# EAGLE board rgbcontroller-3 (EAGLE 8.4.1)
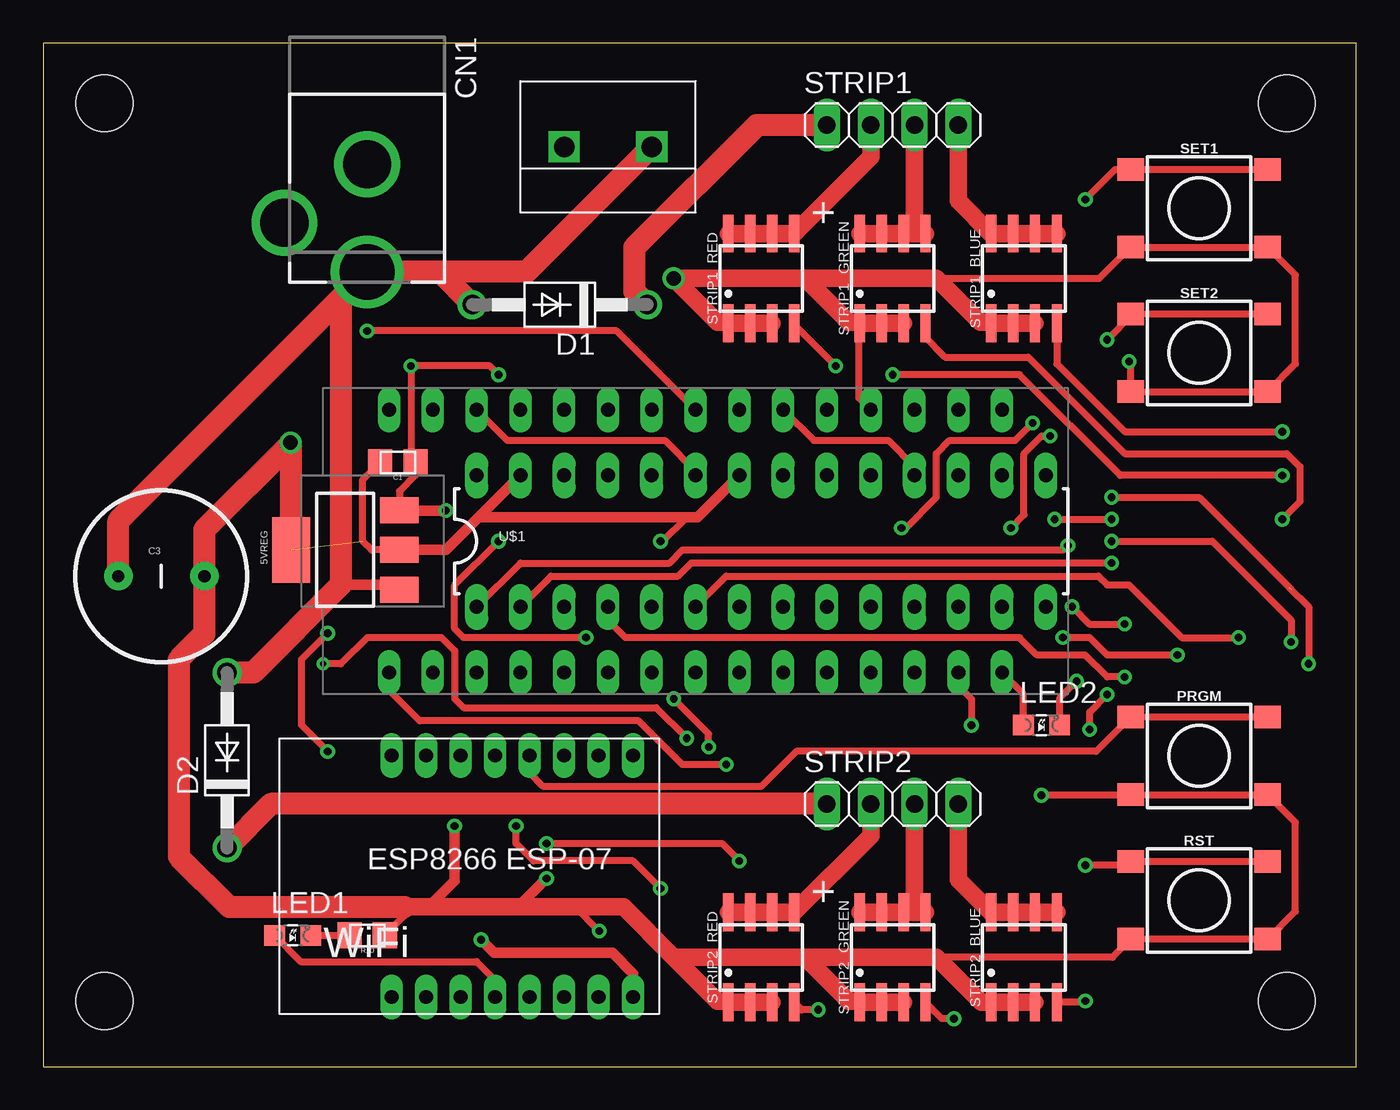
[diagram p0: board, top side]
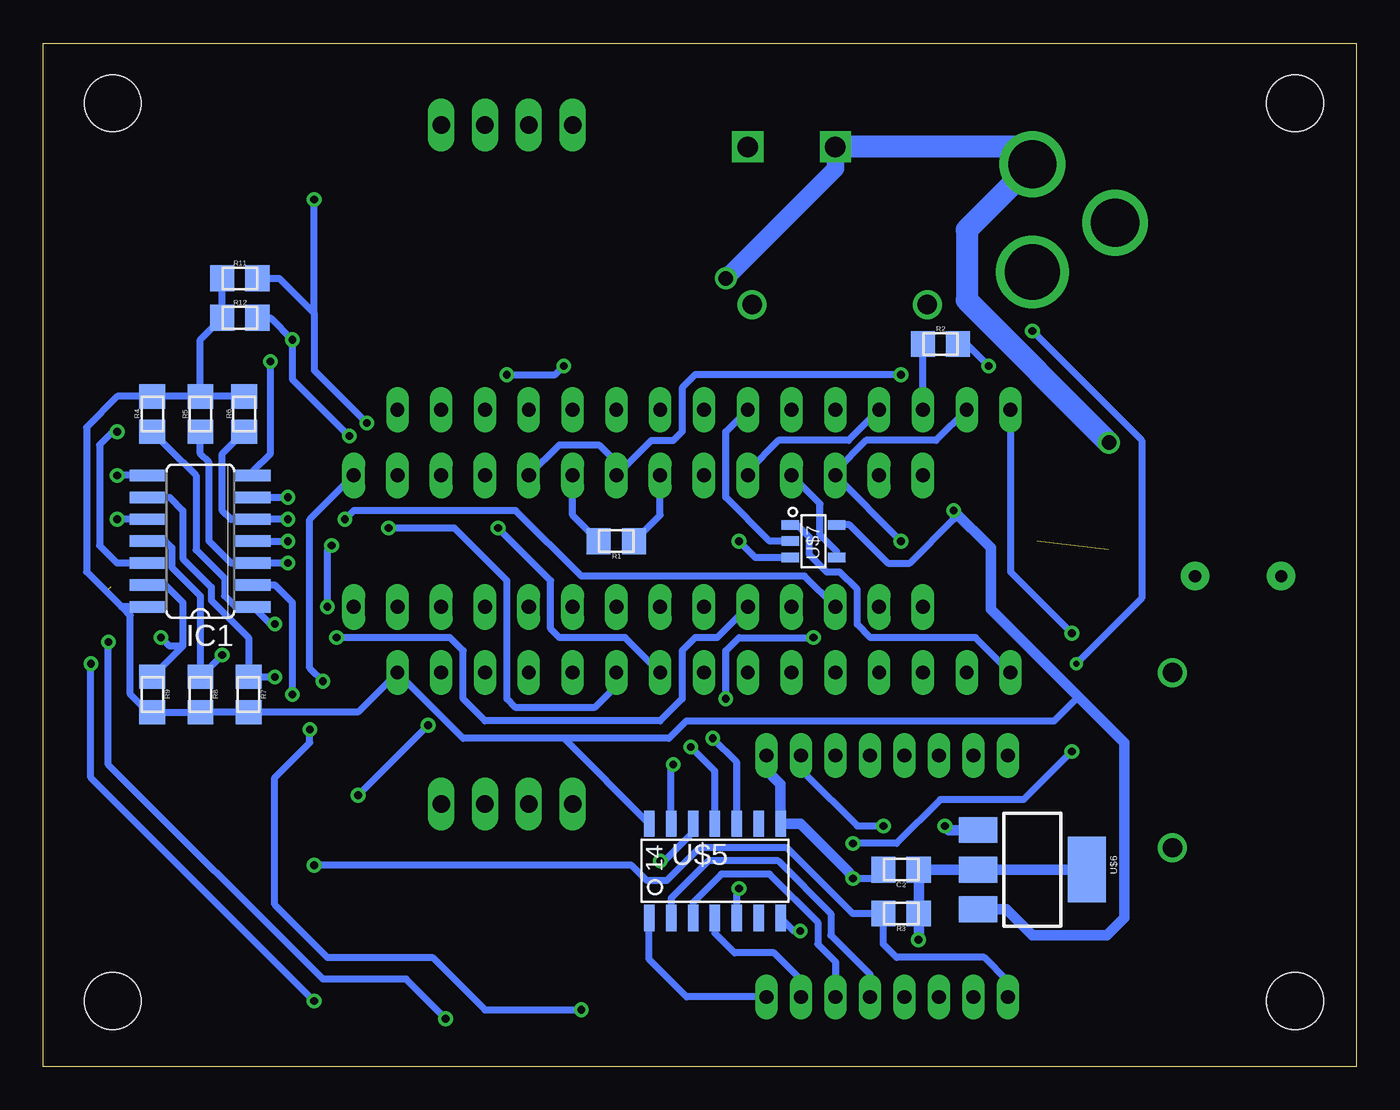
[diagram p1: board, bottom side, seen from below]

Size 76.18 x 59.36 mm. Coordinates in mm from the lower left corner, seen from the top.
Outline: 0,0 76.18,0 76.18,59.36 0,59.36 0,0
Copper layers (1*16): Top 0.035mm / dielectric 1.5mm / Bottom 0.035mm
Design rules "DRC Advanced Circuits": minimum track width 10mil, minimum drill 15mil, track to track 6mil, track to pad 6mil, pad to pad 6mil, via to via 6mil, smd to smd 6mil, copper to edge 40mil, drill to drill 6mil, minimum pad ring 10mil, minimum via ring 8mil, stop-mask expansion 4mil, vias tented up to drill 0mil, thermal gap 10mil
Holes 3.28 mm at 72.14,55.88 3.56,3.81 72.14,3.81 3.56,55.88

## Footprints (pad centres in the part's own frame; a part is rotated, then mirrored left to right if it is on the bottom)
SOT223 = smd 1.5 x 2.235: 1 -2.3,-3.15; 2 0,-3.15; 3 2.3,-3.15 | smd 3.8 x 2.2: 4 0,3.15
0805 = smd 1.4 x 1.5: 1 -1.025,0; 2 1.025,0
CAP-PTH-5MM = drill 0.7 pad 1.651: 1 -2.5,0; 2 2.5,0
DCJACK_2MM_PTH = drill 2.8: GND 0,7.35; GNDBREAK 4.8,10.75 | drill 3.2: PWR 0,13.6
DO-41 = drill 1.118: A 5.08,0; C -5.08,0
SO14 = smd 0.66 x 2.032: 1 -3.81,-3.073; 2 -2.54,-3.073; 3 -1.27,-3.073; 4 0,-3.073; 5 1.27,-3.073; 6 2.54,-3.073; 7 3.81,-3.073; 8 3.81,3.073; 9 2.54,3.073; 10 1.27,3.073; 11 0,3.073; 12 -1.27,3.073; 13 -2.54,3.073; 14 -3.81,3.073
LED-805 = smd 1.2 x 1.2: A 0,-1.05; C 0,1.05
TACTILE_SWITCH_SMD_6.2MM_TALL = smd 1.55 x 1.3: A1 -3.975,-2.25; A2 3.975,-2.25; B1 -3.975,2.25; B2 3.975,2.25
1X04 = drill 1.016 long: 1 -3.81,0; 2 -1.27,0; 3 1.27,0; 4 3.81,0
SOIC-08 = smd 0.6 x 2.2: 1 -1.905,-2.6; 2 -0.635,-2.6; 3 0.635,-2.6; 4 1.905,-2.6; 5 1.905,2.6; 6 0.635,2.6; 7 -0.635,2.6; 8 -1.905,2.6
DIL28-3 = drill 0.813 long: 1 -16.51,-3.81; 2 -13.97,-3.81; 3 -11.43,-3.81; 4 -8.89,-3.81; 5 -6.35,-3.81; 6 -3.81,-3.81; 7 -1.27,-3.81; 8 1.27,-3.81; 9 3.81,-3.81; 10 6.35,-3.81; 11 8.89,-3.81; 12 11.43,-3.81; 13 13.97,-3.81; 14 16.51,-3.81; 15 16.51,3.81; 16 13.97,3.81; 17 11.43,3.81; 18 8.89,3.81; 19 6.35,3.81; 20 3.81,3.81; 21 1.27,3.81; 22 -1.27,3.81; 23 -3.81,3.81; 24 -6.35,3.81; 25 -8.89,3.81; 26 -11.43,3.81; 27 -13.97,3.81; 28 -16.51,3.81
ARDUINO_NANO = drill 0.8 long: 3.3V 1.27,36.83; 5V 1.27,11.43; A0 1.27,31.75; A1 1.27,29.21; A2 1.27,26.67; A3 1.27,24.13; A4 1.27,21.59; A5 1.27,19.05; A6 1.27,16.51; A7 1.27,13.97; AREF 1.27,34.29; D0(RX) 16.51,6.35; D1(TX) 16.51,3.81; D2 16.51,13.97; D3 16.51,16.51; D4 16.51,19.05; D5 16.51,21.59; D6 16.51,24.13; D7 16.51,26.67; D8 16.51,29.21; D9 16.51,31.75; D10 16.51,34.29; D11 16.51,36.83; D12 16.51,39.37; D13 1.27,39.37; GND 1.27,6.35; GND1 16.51,11.43; RST 1.27,8.89; RST1 16.51,8.89; VIN 1.27,3.81
DG301-02P = drill 1.2 square: 1 2.54,3.81; 2 7.62,3.81
ESP8266_ESP-07 = drill 0.8 long: P$1 6.5,-15; P$2 8.5,-15; P$3 10.5,-15; P$4 12.5,-15; P$5 14.5,-15; P$6 16.5,-15; P$7 18.5,-15; P$8 20.5,-15; P$9 20.5,-1; P$10 18.5,-1; P$11 16.5,-1; P$12 14.5,-1; P$13 12.5,-1; P$14 10.5,-1; P$15 8.5,-1; P$16 6.5,-1
SOIC-14 = smd 0.61 x 1.524: 1 -4.445,-2.794; 2 -3.175,-2.794; 3 -1.905,-2.794; 4 -0.635,-2.794; 5 0.635,-2.794; 6 1.905,-2.794; 7 3.175,-2.794; 8 3.175,2.667; 9 1.905,2.667; 10 0.635,2.667; 11 -0.635,2.667; 12 -1.905,2.667; 13 -3.175,2.667; 14 -4.445,2.667
SOT-23-5 = smd 1 x 0.55: 1 -1.35,0.95; 2 -1.35,0; 3 -1.35,-0.95; 4 1.35,-0.95; 5 1.35,0.95

## Placement (x,y rotation side)
5VREG  [SOT223]  17.53,29.97 90 top
C1  .1µF  [0805]  20.57,35.05 180 top
C2  1µF  [0805]  26.42,11.43 180 bottom
C3  [CAP-PTH-5MM]  6.86,28.45 0 top
CN1  [DCJACK_2MM_PTH]  18.8,59.69 180 top
D1  DIODEDO-41  [DO-41]  29.97,44.2 180 top
D2  DIODEDO-41  [DO-41]  10.67,17.78 90 top
IC1  74HC04D  [SO14]  67.06,30.48 90 bottom
LED1  Red  [LED-805]  14.48,7.62 270 top
LED2  [LED-805]  57.91,19.81 270 top
PRGM  [TACTILE_SWITCH_SMD_6.2MM_TALL]  67.06,18.03 0 top
R1  2.2k  [0805]  42.93,30.48 180 bottom
R2  10k  [0805]  24.13,41.91 0 bottom
R3  10k  [0805]  26.42,8.89 180 bottom
R4  10k  [0805]  69.85,37.85 90 bottom
R5  10k  [0805]  67.06,37.85 90 bottom
R6  10k  [0805]  64.52,37.85 90 bottom
R7  10k  [0805]  64.26,21.59 270 bottom
R8  10k  [0805]  67.06,21.59 270 bottom
R9  10k  [0805]  69.85,21.59 270 bottom
R10  100  [0805]  18.8,7.62 180 top
R11  10k  [0805]  64.77,45.72 0 bottom
R12  10k  [0805]  64.77,43.43 0 bottom
RST  [TACTILE_SWITCH_SMD_6.2MM_TALL]  67.06,9.65 0 top
SET1  [TACTILE_SWITCH_SMD_6.2MM_TALL]  67.06,49.78 0 top
SET2  [TACTILE_SWITCH_SMD_6.2MM_TALL]  67.06,41.4 0 top
STRIP1  [1X04]  49.28,54.61 0 top
STRIP1_BLUE  MDS1656  [SOIC-08]  56.9,45.72 0 top
STRIP1_GREEN  MDS1656  [SOIC-08]  49.28,45.72 0 top
STRIP1_RED  MDS1656  [SOIC-08]  41.66,45.72 0 top
STRIP2  [1X04]  49.28,15.24 0 top
STRIP2_BLUE  MDS1656  [SOIC-08]  56.9,6.35 0 top
STRIP2_GREEN  MDS1656  [SOIC-08]  49.28,6.35 0 top
STRIP2_RED  MDS1656  [SOIC-08]  41.66,6.35 0 top
U$1  TLC5940  [DIL28-3]  41.66,30.48 0 top
U$2  ARDUINO_NANO  [ARDUINO_NANO]  59.44,21.59 90 top
U$3  TERMINAL_BLOCK_DG301-02P  [DG301-02P]  37.85,57.15 180 top
U$4  ESP8266_ESP-07  [ESP8266_ESP-07]  13.72,19.05 0 top
U$5  [SOIC-14]  36.58,11.43 0 bottom
U$6  TLV1117LV33  [SOT223]  18.8,11.43 270 bottom
U$7  SN74LVC1G08  [SOT-23-5]  31.5,30.48 0 bottom

## Library data of the parts
5VREG C1-C3 CN1 D1 D2 LED1 LED2 PRGM R1-R12 RST SET1 SET2 STRIP1 STRIP1_BLUE STRIP1_GREEN STRIP1_RED STRIP2 STRIP2_BLUE STRIP2_GREEN STRIP2_RED U$1-U$7 = HyTechDevices
IC1 = 74xx-eu; SPICEPREFIX: I

## Nets
+3V3: C2.1 R3.1 U$4.P$8 U$5.1 U$6.2 U$6.4
+5V: 5VREG.3 C1.1 IC1.14 LED2.A R2.2 R4.2 R5.2 R6.2 R7.2 R8.2 R9.2 R11.1 R12.1 U$1.19 U$1.21 U$2.VIN U$5.14 U$6.3 U$7.5
+12V: 5VREG.1 C3.1 CN1.PWR D1.A D2.A U$3.1
BLANK: R2.1 U$1.23 U$2.D10
GND: 5VREG.2 5VREG.4 C1.2 C2.2 C3.2 CN1.GND IC1.7 PRGM.A1 PRGM.A2 R1.1 R10.1 RST.A1 RST.A2 SET1.A1 SET1.A2 SET2.A1 SET2.A2 STRIP1_BLUE.1 STRIP1_BLUE.2 STRIP1_BLUE.3 STRIP1_GREEN.1 STRIP1_GREEN.2 STRIP1_GREEN.3 STRIP1_RED.1 STRIP1_RED.2 STRIP1_RED.3 STRIP2_BLUE.1 STRIP2_BLUE.2 STRIP2_BLUE.3 STRIP2_GREEN.1 STRIP2_GREEN.2 STRIP2_GREEN.3 STRIP2_RED.1 STRIP2_RED.2 STRIP2_RED.3 U$1.22 U$1.27 U$2.GND U$2.GND1 U$3.2 U$4.P$9 U$5.7 U$5.8 U$6.1 U$7.3
GNDBREAK: CN1.GNDBREAK
MISO: U$2.D12 U$5.12
MISO_33: U$4.P$6 U$5.3
MOSI: U$1.26 U$2.D11 U$5.11
MOSI_33: U$4.P$7 U$5.4
N$1: STRIP2.2 STRIP2_RED.5 STRIP2_RED.6 STRIP2_RED.7 STRIP2_RED.8
N$2: STRIP1.2 STRIP1_RED.5 STRIP1_RED.6 STRIP1_RED.7 STRIP1_RED.8
N$3: IC1.2 STRIP2_RED.4
N$4: IC1.4 STRIP2_GREEN.4
N$5: PRGM.B1 PRGM.B2 U$4.P$12
N$6: R1.2 U$1.20
N$7: U$1.18 U$2.D3
N$8: LED1.A U$4.P$4
N$9: IC1.8 STRIP1_RED.4
N$10: IC1.10 STRIP1_GREEN.4
N$11: IC1.12 STRIP1_BLUE.4
N$12: IC1.6 STRIP2_BLUE.4
N$13: IC1.1 R4.1 U$1.1
N$14: IC1.3 R5.1 U$1.2
N$15: STRIP1.3 STRIP1_GREEN.5 STRIP1_GREEN.6 STRIP1_GREEN.7 STRIP1_GREEN.8
N$16: STRIP1.4 STRIP1_BLUE.5 STRIP1_BLUE.6 STRIP1_BLUE.7 STRIP1_BLUE.8
N$17: STRIP2.3 STRIP2_GREEN.5 STRIP2_GREEN.6 STRIP2_GREEN.7 STRIP2_GREEN.8
N$18: STRIP2.4 STRIP2_BLUE.5 STRIP2_BLUE.6 STRIP2_BLUE.7 STRIP2_BLUE.8
N$19: IC1.5 R6.1 U$1.3
N$20: IC1.13 R9.1 U$1.6
N$21: R3.2 RST.B1 RST.B2 U$4.P$1
N$22: IC1.11 R8.1 U$1.5
N$23: IC1.9 R7.1 U$1.4
N$24: LED2.C U$1.15
N$25: LED1.C R10.2
N$26: D1.C STRIP1.1
N$27: D2.C STRIP2.1
SCK: U$2.D13 U$5.13 U$7.1
SCK_33: U$4.P$5 U$5.2
SCK_TLC5940: U$1.25 U$7.4
SET1: R11.2 SET1.B1 SET1.B2 U$2.A5
SET2: R12.2 SET2.B1 SET2.B2 U$2.A6
SS_ESP8266: U$2.D5 U$5.10
SS_ESP8266_33: U$4.P$10 U$5.5
SS_TLC5940: U$2.D6 U$7.2
XLAT: U$1.24 U$2.D9

## Tracks (layer width: path | path; a pad name or v marks a point on that pad's centre or on a via)
+3V3  (via drill 0.45)
  Top 0.61: U$4.P$8 34.22,5.41 33.02,6.6 26.16,6.6 v25.4,7.37
  Bottom 0.406: U$4.P$8 38.85,4.05 41.02,6.22 U$5.1
  Bottom 0.61: U$6.4 U$6.2 C2.1 R3.1 v25.39,7.38 v25.4,7.37
+5V  (via drill 0.45)
  Top 0.406: 5VREG.3 20.68,33.38 21.59,34.29 C1.1 21.34,35.31 v21.34,40.64 25.91,40.64 v26.42,40.13 | LED2.A 56.86,21.62 U$2.VIN
  Top 0.61: 5VREG.3 20.69,32.26 v23.37,32.26
  Bottom 0.406: R2.2 22.61,41.91 v21.34,40.64 | R6.2 R5.2 | R5.2 R4.2 71.87,38.87 73.66,37.08 73.66,28.7 71.63,26.67 | U$1.19 46.23,36.07 43.94,36.07 42.93,35.05 U$1.21 40.89,36.32 39.62,36.32 39.12,36.83 39.12,39.37 38.35,40.13 v26.42,40.13 | U$5.14 45.97,19.05 | 45.97,19.05 51.82,19.05 U$2.VIN 57.92,20.56 R7.2 R8.2 R9.2 70.09,20.56 71.12,21.59 71.12,26.16 71.63,26.67 | 45.97,19.05 39.88,19.05 38.86,20.07 17.53,20.07 16.13,21.46 | U$7.5 29.4,31.43 27.18,29.21 25.91,29.21 23.37,31.75 v23.37,32.26 | IC1.14 71.63,26.67 | R11.1 R12.1 67.06,42.17 R5.2
  Bottom 0.61: v23.37,32.26 21.21,30.1 21.21,26.54 16.13,21.46 13.46,18.8 13.46,8.64 14.48,7.62 18.8,7.62 20.31,9.13 U$6.3
+12V
  Top 0.61: 5VREG.1 20.44,27.94 17.27,27.94
  Top 1.27: 21.84,46.09 28.06,46.09 U$3.1 | 21.84,46.09 CN1.PWR 17.27,44.57 | 17.27,44.57 17.27,27.94 12.19,22.86 D2.A | C3.1 4.36,31.65 17.27,44.57 | 21.84,46.09 23,46.09 D1.A
BLANK
  Top 0.406: U$2.D10 26.92,36.32 36.07,36.32 37.85,34.54 U$1.23
  Bottom 0.406: U$2.D10 R2.1
GND  (via drill 0.45, 0.85)  (1 unrouted)
  Top 0.406: 5VREG.2 19.05,29.97 18.54,30.48 18.54,34.05 C1.2 | R10.1 20.95,8.75 20.95,9.27 | U$2.GND1 47.31,38.8 47.31,43.18 | U$2.GND 53.09,22.1 53.85,21.34 v53.85,19.81 | v35.81,30.48 35.94,30.48 37.34,31.88 | v32.26,7.87 30.86,9.27 30.73,9.27 | v62.99,40.89 63.08,40.8 SET2.A1 SET2.A2 72.64,40.77 72.64,45.92 SET1.A2 SET1.A1 61.27,45.72 51.82,45.72 | v57.91,15.75 63.05,15.75 PRGM.A1 PRGM.A2 72.64,14.17 72.64,9.02 RST.A2 RST.A1 62.03,6.35 51.82,6.35
  Top 0.61: 25.27,31.88 23.37,29.97 5VREG.2 | 25.27,31.88 U$1.27 | U$1.22 37.97,31.88 37.34,31.88 25.27,31.88 | 22.35,9.27 23.88,10.8 v23.88,13.97 | v29.21,10.92 27.56,9.27 26.92,9.27
  Top 1.016: STRIP2_GREEN.3 STRIP2_GREEN.2 STRIP2_GREEN.1 47.31,3.81 46.74,3.81 44.2,6.35 | 36.58,6.35 39.12,3.81 39.69,3.81 STRIP2_RED.1 STRIP2_RED.2 STRIP2_RED.3 | 44.2,6.35 36.58,6.35 | 44.2,6.35 51.82,6.35 54.42,3.75 STRIP2_BLUE.1 STRIP2_BLUE.2 STRIP2_BLUE.3 | 36.58,6.35 33.66,9.27 30.73,9.27 26.92,9.27 22.35,9.27 20.95,9.27 | 44.2,45.72 v36.58,45.72 39.12,43.18 39.69,43.18 STRIP1_RED.1 STRIP1_RED.2 STRIP1_RED.3 | 44.2,45.72 51.82,45.72 54.36,43.18 54.93,43.18 STRIP1_BLUE.1 STRIP1_BLUE.2 STRIP1_BLUE.3 | 44.2,45.72 46.74,43.18 47.31,43.18 STRIP1_GREEN.1 STRIP1_GREEN.2 STRIP1_GREEN.3
  Top 1.27: 14.38,36.17 v14.35,36.19 | 5VREG.4 14.38,36.17 | 14.38,36.17 9.36,31.15 C3.2 9.36,25.11 7.87,23.62 7.87,12.19 10.79,9.27 20.95,9.27
  Bottom 0.406: v29.21,10.92 27.95,10.92 C2.2 | R1.1 40.39,32 U$1.22 | IC1.7 63.98,34.57 62.99,35.56 v62.99,40.89 | v53.85,19.81 v57.91,15.75 | U$7.3 34.86,29.53 v35.81,30.48 | U$5.7 32.64,7.87 v32.26,7.87
  Bottom 0.61: v23.88,13.97 23.64,13.73 U$6.1 | U$4.P$9 34.04,17.87 34.04,17.02 33.4,16.38 U$5.8 32.26,14.1 29.46,11.3 v29.21,10.92
  Bottom 1.016: v36.58,45.72 30.23,52.07 U$3.2
  Bottom 1.27: v14.35,36.19 22.61,44.45 22.61,48.53 CN1.GND 19.8,53.34 U$3.2
MISO  (via drill 0.45)
  Top 0.406: v40.39,11.94 39.37,12.95 v29.21,12.95 | v16.51,18.29 14.99,19.81 14.99,23.62 v16.51,25.15
  Bottom 0.406: U$2.D12 20.07,28.7 v16.51,25.15 | v29.21,12.95 26.67,12.95 24.13,15.49 19.3,15.49 v16.51,18.29 | U$5.12 38.48,13.59 40.13,11.94 v40.39,11.94
MISO_33
  Bottom 0.406: U$4.P$6 30.22,6.09 31.24,7.11 31.24,8.38 34.04,11.18 36.83,11.18 38.48,9.52 U$5.3
MOSI  (via drill 0.45)
  Top 0.406: v38.61,18.54 38.61,19.3 v36.58,21.34 | v31.5,24.89 24.38,24.89 23.88,25.4 23.88,27.94 v26.42,30.48
  Bottom 0.406: U$2.D11 24.38,36.32 28.45,36.32 30.23,34.54 U$1.26 v26.42,30.48 | U$5.11 37.21,17.14 v38.61,18.54 | v36.58,21.34 36.58,24.13 35.81,24.89 v31.5,24.89
MOSI_33
  Bottom 0.406: U$5.4 37.21,7.75 36.07,6.6 33.78,6.6 32.22,5.04 U$4.P$7
N$1
  Top 1.016: STRIP2_RED.8 STRIP2_RED.7 STRIP2_RED.6 STRIP2_RED.5 48.01,13.39 STRIP2.2
N$2
  Top 1.016: STRIP1_RED.8 STRIP1_RED.7 STRIP1_RED.6 STRIP1_RED.5 48.01,52.77 STRIP1.2
N$3  (via drill 0.45)
  Top 0.406: v44.96,3.3 44.01,3.3 STRIP2_RED.4 | v60.71,19.56 60.71,20.57 v61.72,21.59
  Bottom 0.406: IC1.2 62.74,27.94 61.72,26.92 v61.72,21.59 | v44.96,3.3 50.55,3.3 53.59,6.35 59.69,6.35 62.74,9.4 62.74,16.76 60.71,18.8 v60.71,19.56
N$4  (via drill 0.45)
  Top 0.406: v61.98,30.48 67.82,30.48 72.39,25.91 v72.39,24.64 | v52.83,2.79 52.14,2.79 STRIP2_GREEN.4
  Bottom 0.406: IC1.4 v61.98,30.48 | v52.83,2.79 55.12,5.08 59.94,5.08 72.39,17.53 v72.39,24.64
N$5
  Top 0.406: PRGM.B2 PRGM.B1 61.09,18.29 43.69,18.29 41.68,16.28 28.98,16.28 28.22,17.05 U$4.P$12
N$6
  Bottom 0.406: R1.2 45.47,32 U$1.20
N$7
  Top 0.406: U$2.D3 44.7,36.32 49.02,36.32 50.55,34.8 U$1.18
N$8
  Top 0.406: LED1.A 14.95,6.1 25.15,6.1 26.22,5.03 U$4.P$4
N$9  (via drill 0.45)
  Top 0.406: v49.28,40.13 56.64,40.13 62.48,34.29 v71.88,34.29 | v45.97,40.64 43.56,43.05 STRIP1_RED.4
  Bottom 0.406: IC1.8 v71.88,34.29 | v49.28,40.13 46.48,40.13 v45.97,40.64
N$10  (via drill 0.45)
  Top 0.406: v71.88,31.75 72.9,32.77 72.9,34.8 72.14,35.56 62.74,35.56 57.15,41.15 52.32,41.15 51.18,42.29 STRIP1_GREEN.4
  Bottom 0.406: IC1.10 v71.88,31.75
N$11  (via drill 0.45)
  Top 0.406: STRIP1_BLUE.4 58.8,40.77 62.74,36.83 v71.88,36.83
  Bottom 0.406: IC1.12 71.88,29.21 72.9,30.23 72.9,36.07 72.14,36.83 v71.88,36.83
N$12  (via drill 0.45)  (1 unrouted)
  Top 0.406: v61.98,33.02 67.06,33.02 72.39,27.69 | v60.45,3.81 60.39,3.75 STRIP2_BLUE.4 | 72.26,27.81 73.41,26.67 v73.41,23.37
  Bottom 0.406: IC1.6 v61.98,33.02 | v60.45,3.81 73.41,16.76 v73.41,23.37
N$13  (via drill 0.45)
  Top 0.406: U$1.1 27.69,29.21 36.32,29.21 37.08,29.97 59.18,29.97 v59.44,30.23 | v59.69,26.67 60.68,25.68 v62.74,25.68
  Bottom 0.406: R4.1 68.08,35.05 68.07,35.05 67.31,34.29 67.31,29.97 65.66,28.32 65.66,27.3 65.02,26.67 IC1.1 62.99,25.68 v62.74,25.68 | v59.44,30.23 59.69,29.97 v59.69,26.67
N$14  (via drill 0.45)
  Top 0.406: U$1.2 29.46,28.45 36.83,28.45 37.59,29.21 v61.98,29.21
  Bottom 0.406: R5.1 67.06,35.56 66.55,35.05 66.55,30.48 65.28,29.21 IC1.3 v61.98,29.21
N$15
  Top 1.016: STRIP1_GREEN.8 STRIP1_GREEN.7 STRIP1_GREEN.6 STRIP1_GREEN.5 50.55,48.95 STRIP1.3
N$16
  Top 1.016: STRIP1_BLUE.5 STRIP1_BLUE.6 STRIP1_BLUE.7 STRIP1_BLUE.8 53.09,50.22 STRIP1.4
N$17
  Top 1.016: STRIP2_GREEN.8 STRIP2_GREEN.7 STRIP2_GREEN.6 STRIP2_GREEN.5 50.55,9.59 STRIP2.3
N$18
  Top 1.016: STRIP2_BLUE.5 STRIP2_BLUE.6 STRIP2_BLUE.7 STRIP2_BLUE.8 53.09,10.85 STRIP2.4
N$19  (via drill 0.45)
  Top 0.406: v58.67,31.75 v61.98,31.75
  Bottom 0.406: R6.1 65.79,35.55 65.79,32.26 65.28,31.75 IC1.5 v61.98,31.75 | U$1.3 32,28.45 44.96,28.45 48.77,32.26 58.17,32.26 v58.67,31.75
N$20  (via drill 0.45)
  Top 0.406: U$1.6 39.62,28.45 61.21,28.45 61.72,27.94 62.99,27.94 66.04,24.89 v69.34,24.89
  Bottom 0.406: IC1.13 69.09,27.94 68.07,26.92 68.07,24.39 | R9.1 68.07,24.39 | 68.07,24.39 68.84,24.39 v69.34,24.89
N$21  (via drill 0.45)
  Top 0.406: RST.B2 RST.B1 62.86,11.68 v60.45,11.68
  Bottom 0.406: U$4.P$1 20.22,4.98 21.59,6.35 26.67,6.35 27.44,7.12 R3.2 29.21,8.89 33.02,12.7 38.1,12.7 40.01,10.8 41.15,10.8 42.04,11.68 v60.45,11.68
N$22  (via drill 0.45)
  Top 0.406: v59.16,24.89 60.71,24.89 61.72,23.88 v65.79,23.88
  Bottom 0.406: IC1.11 69.09,30.48 68.71,30.1 68.71,28.96 67.06,27.3 R8.1 v65.79,23.88 | U$1.5 37.08,24.89 38.35,24.89 39.12,24.13 39.12,21.34 40.39,20.07 50.55,20.07 51.82,21.34 51.82,24.13 52.58,24.89 v59.16,24.89
N$23  (via drill 0.45)
  Top 0.406: U$1.4 32.77,25.91 33.78,24.89 56.64,24.89 57.66,23.88 60.45,23.88 61.72,22.61 v62.74,22.61
  Bottom 0.406: IC1.9 68.83,33.02 68.07,32.26 68.07,29.46 66.42,27.81 66.42,27.05 64.26,24.89 R7.1 62.75,22.62 v62.74,22.61
N$24  (via drill 0.45)
  Top 0.406: v59.94,22.35 58.96,21.37 LED2.C
  Bottom 0.406: v59.94,22.35 60.71,23.11 60.71,31.75 U$1.15
N$25
  Top 0.406: LED1.C R10.2
N$26
  Top 1.27: D1.C 34.29,44.96 34.29,47.5 41.4,54.61 STRIP1.1
N$27
  Top 1.27: STRIP2.1 13.21,15.24 D2.C
SCK  (via drill 0.45)
  Top 0.406: U$2.D13 20.07,21.84 21.84,20.07 34.54,20.07 37.08,17.53 v39.62,17.53
  Bottom 0.406: U$5.13 39.75,17.4 v39.62,17.53 | U$2.D13 22.1,24.89 28.19,24.89 28.96,25.65 28.96,27.69 29.97,28.7 30.73,28.7 31.75,29.72 31.75,30.73 32.45,31.43 U$7.1
SCK_33
  Bottom 0.406: U$4.P$5 28.22,5.36 30.48,7.62 30.48,8.89 33.53,11.94 37.59,11.94 39.75,9.78 U$5.2
SCK_TLC5940
  Bottom 0.406: U$7.4 30.15,29.89 31.12,30.86 31.12,32.64 U$1.25
SET1  (via drill 0.45)
  Top 0.406: SET1.B2 SET1.B1 62.19,52.03 v60.45,50.29 | v49.78,31.24 50.04,31.24 51.82,33.02 51.82,35.56 52.58,36.32 56.39,36.32 v57.4,37.34
  Bottom 0.406: U$2.A5 42.42,24.89 46.23,24.89 46.74,25.4 46.74,28.19 v49.78,31.24 | v57.4,37.34 60.45,40.39 60.45,43.69 | 60.45,43.69 v60.45,50.29 | R11.2 62.48,45.72 60.45,43.69
SET2  (via drill 0.45)
  Top 0.406: SET2.B2 SET2.B1 63.08,43.52 v61.72,42.16 | v56.13,31.24 56.9,32 56.9,35.56 57.91,36.58 v58.42,36.58
  Bottom 0.406: U$2.A6 42.93,22.1 44.2,20.83 48.77,20.83 49.28,21.34 49.28,28.19 52.32,31.24 v56.13,31.24 | v58.42,36.58 61.72,39.88 v61.72,42.16 62.99,43.43 R12.2
SS_ESP8266  (via drill 0.35, 0.45)
  Top 0.406: v37.34,19.05 35.56,20.83 24.38,20.83 23.88,21.34 23.88,24.13 23.11,24.89 18.8,24.89 17.27,23.37 v16.26,23.37 | U$2.D5 33.27,42.67 v18.8,42.67
  Bottom 0.406: U$5.10 35.94,17.65 v37.34,19.05 | v18.8,42.67 12.45,36.32 12.45,27.18 v16.26,23.37
SS_ESP8266_33  (via drill 0.45)
  Top 0.406: 35.81,10.41 v35.81,10.34 34.22,11.94 28.45,11.94 27.43,12.95 v27.43,13.97
  Bottom 0.406: U$5.5 35.94,10.21 v35.81,10.34 | U$4.P$10 32,17.84 32,17.02 28.96,13.97 v27.43,13.97
SS_TLC5940
  Bottom 0.406: U$7.2 34.04,30.48 36.58,33.02 36.58,36.83 U$2.D6
XLAT
  Bottom 0.406: U$2.D9 29.46,36.32 33.53,36.32 35.31,34.54 U$1.24

## Text on the board
tPlace: ➡ | + | ➡ | +
tDocu: rev3